# Altium PCB Interface_2 PCB.PcbDoc
Units mil, origin at the board's own origin, x right, y up, seen from the top; angles counter-clockwise.
Board outline 2362.2 x 1574.8 mil, 2 copper layers (Top Layer, Bottom Layer); 30 components, 31 nets, 120 pads, 31 vias.
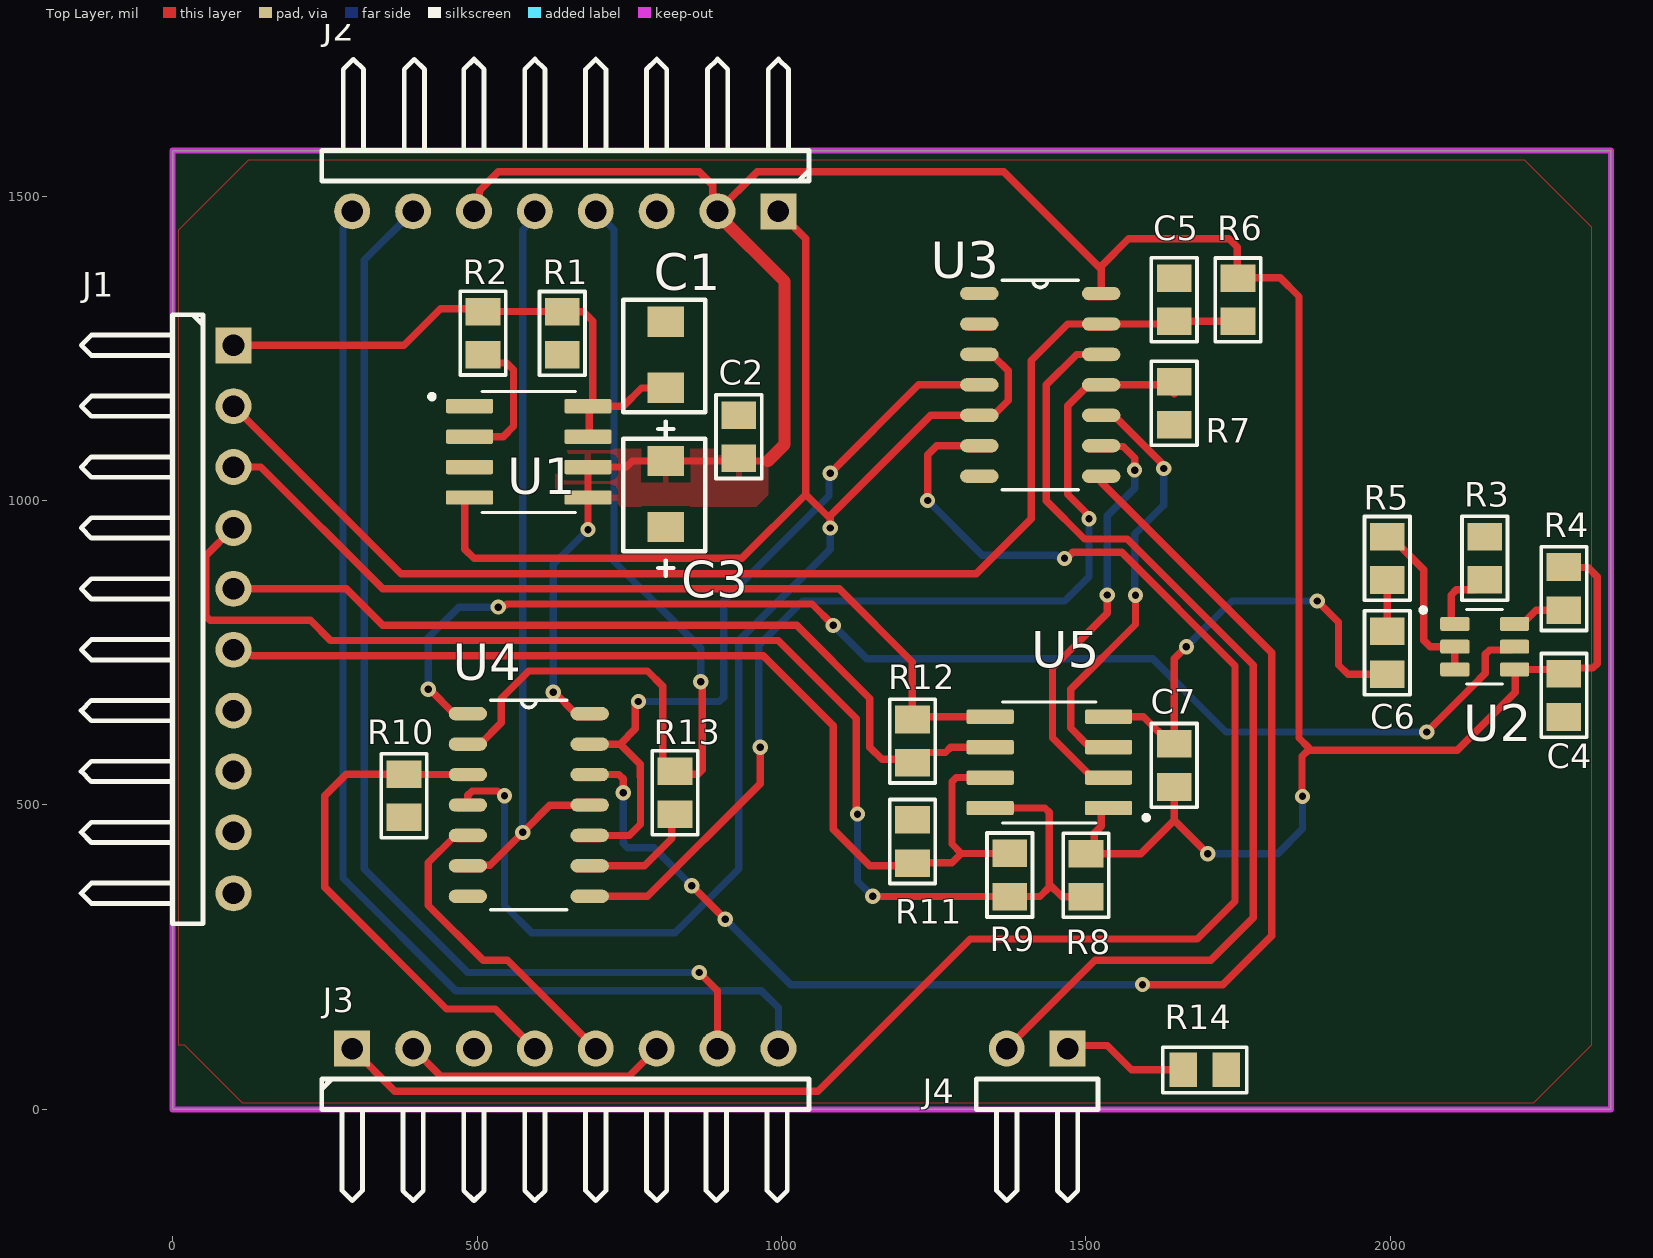
[diagram p0: Top Layer view]
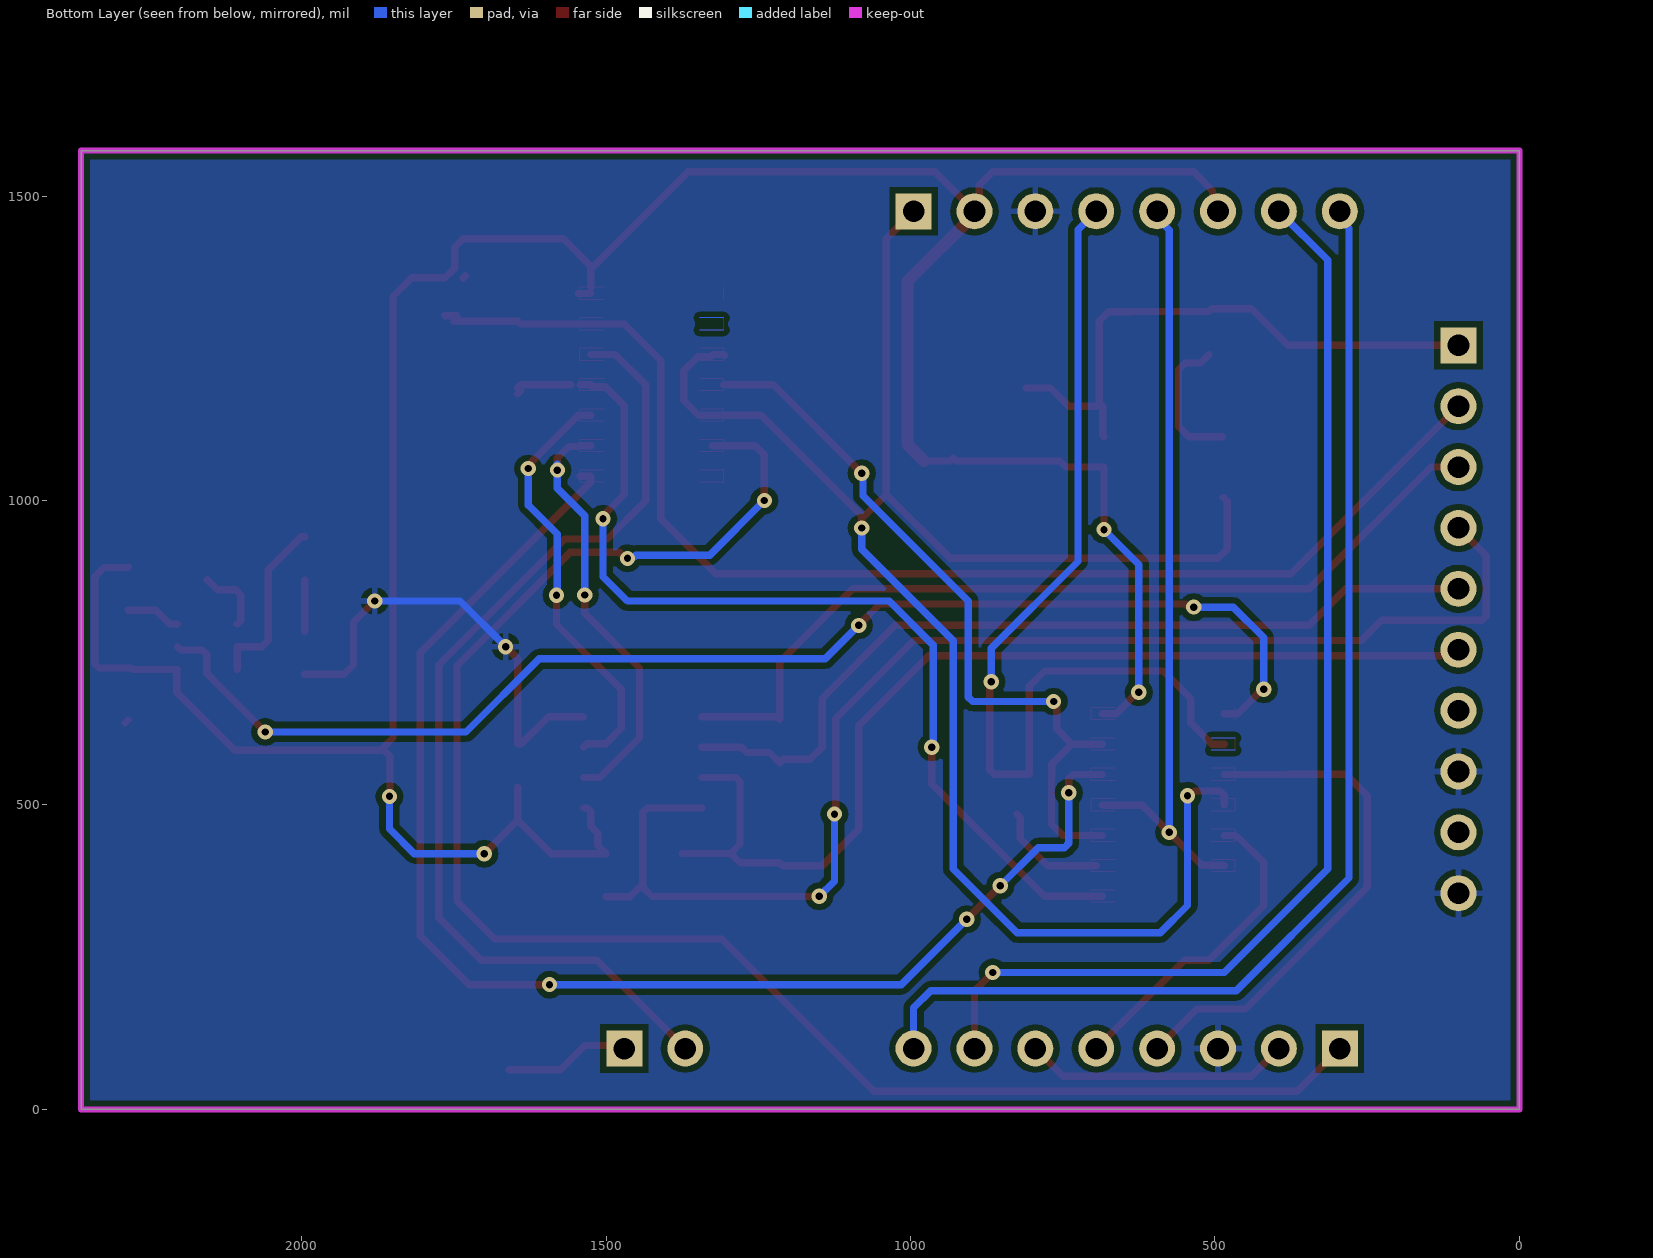
[diagram p1: Bottom Layer view, seen from below]
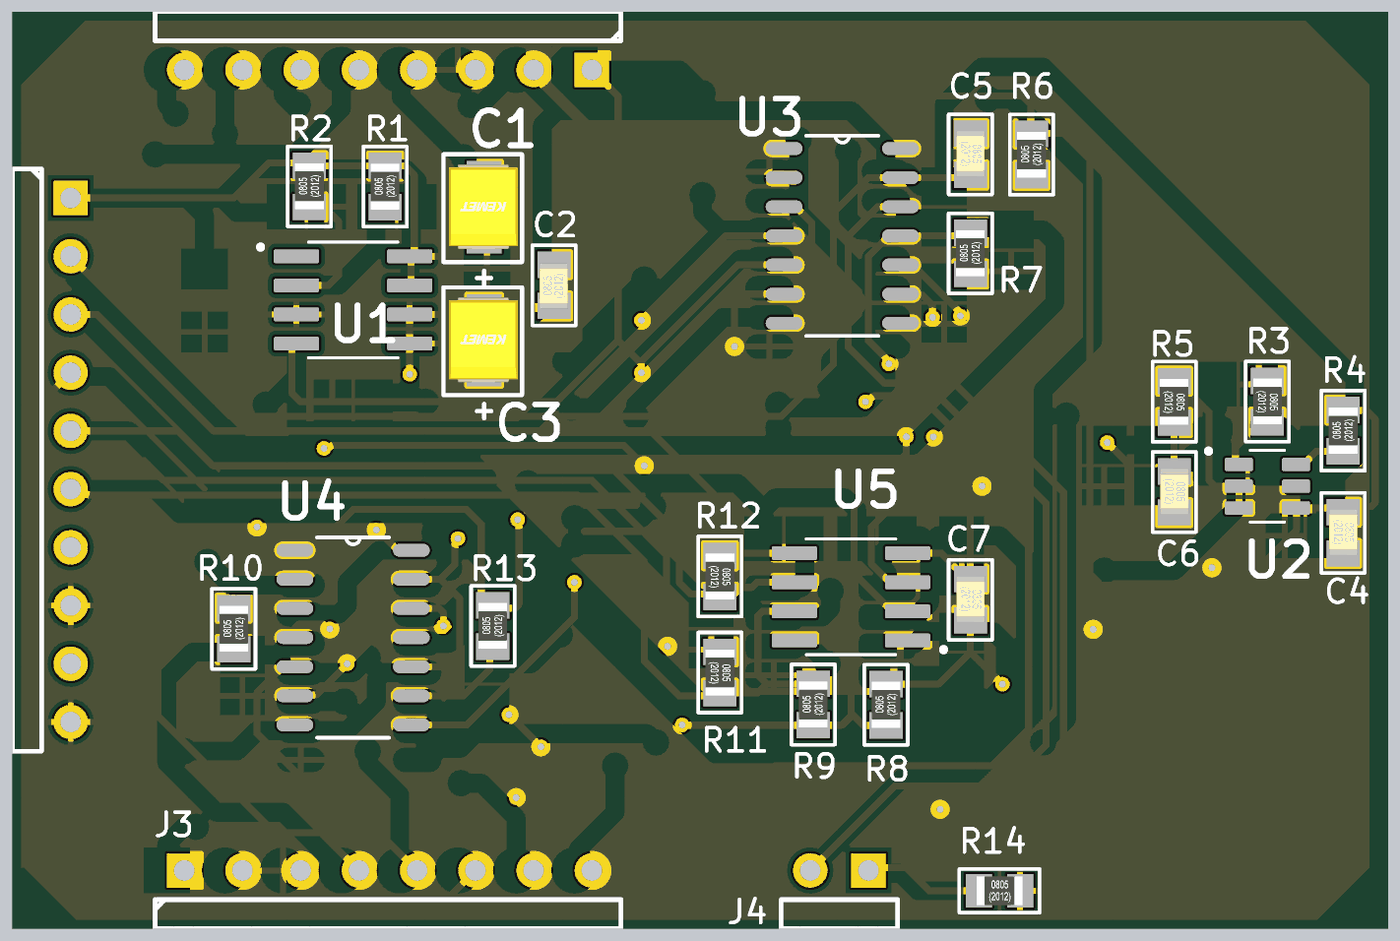
[diagram p2: 3D render of the assembled board from above, using the file's embedded part models]

## Layer stack, top to bottom
Top Solder: solder mask 0.4, Solder Resist, Dk 3.5
Top Layer: signal copper 1.4
Dielectric 1: dielectric 12.6, FR-4, Dk 4.8
Bottom Layer: signal copper 1.4
Bottom Solder: solder mask 0.4, Solder Resist, Dk 3.5

## Board outline
0,0 0,1574.8 2362.2,1574.8 2362.2,0

## Design rules (kind name [scope] priority, off if disabled: settings)
Clearance Clearance_1 [All] p1: gap=10 ignorepadtopadclearanceinfootprint=FALSE
Clearance Clearance_u3 [InPadClass('u3')] p2: gap=3.7 ignorepadtopadclearanceinfootprint=FALSE
PolygonConnect [All] p1: connectstyle=Relief reliefconductorwidth=10 reliefentries=4 polygonreliefangle="90 Angle" airgapwidth=10
RoutingVias [All] p1: holewidth=28 width=50 viastyle="Through Hole" minholewidth=12 minwidth=25 maxholewidth=28 maxwidth=50
SolderMaskExpansion [All] p1: expansion=4 istentingtop=FALSE
Width [All] p1: maxlimit=100 minlimit=12 preferedwidth=20 minimp=50.000000 maximp=50.000000 favimp=50.000000
30 further rules are at their usual default settings.

## Classes and differential pairs
pad class u3: U3-1 U3-2 U3-3 U3-4 U3-5 U3-6 U3-7 U3-8 U3-9 U3-10 U3-11 U3-12 U3-13 U3-14
component class "Interface_2 SCH": C1 C2 C3 C4 C5 C6 C7 J2 J3 J4 R1 R2 R3 R4 R5 R6 R7 R8 R9 R10 R11 R12 R13 R14 U2 U3 U4 U5

## Components (designator, comment, footprint, x,y, rotation, side; value= is the part's Value field where it differs from the comment)
C1 "10uF" CASE-B 810,1185 r90 top
C2 "100nF" CAPC2012X14N(0805) 930,1105 r90 top
C3 "10uF" CASE-B 810,956.57 r90 top
C4 "100nF" CAPC2012X14N(0805) 2285,680 r270 top
C5 "100nF" CAPC2012X14N(0805) 1645,1330 r270 top
C6 "100nF" CAPC2012X14N(0805) 1995,750 r270 top
C7 "100nF" CAPC2012X14N(0805) 1645,565 r270 top
J1 "2x10 Header" HEADER-2x10H 100,1255 r270 top
J2 "177537-8" HEADER-1X8H 995,1475 r180 top
J3 "177537-8" HEADER-1X8H 295,100 r0 top
J4 "1x2 Header" HEADER-1X2H 1470,100 r180 top
R1 "100K" RESC2013X70N(0805) 640,1274.57 r90 top
R2 "330K" RESC2013X70N(0805) 510,1275 r90 top
R3 "1K" RESC2013X70N(0805) 2155,905.43 r270 top
R4 "22K" RESC2013X70N(0805) 2285,855.43 r90 top
R5 "100K" RESC2013X70N(0805) 1995,905 r270 top
R6 "47K" RESC2013X70N(0805) 1750,1329.57 r90 top
R7 "100K" RESC2013X70N(0805) 1645,1160 r90 top
R8 "10K" RESC2013X70N(0805) 1500,384.57 r90 top
R9 "1K" RESC2013X70N(0805) 1375,385 r90 top
R10 "100K" RESC2013X70N(0805) 380,515 r90 top
R11 "10K" RESC2013X70N(0805) 1215,440 r270 top
R12 "1K" RESC2013X70N(0805) 1215,605 r270 top
R13 "0R" RESC2013X70N(0805) 825,520 r90 top
R14 "1M" RESC2013X70N(0805) 1695,65 r0 top
U1 "TPS76633D" SOIC-8 585,1080 r0 top
U2 "FDC6324L" SUPERSOT-6 2155,760 r0 top
U3 "74HC14" SO-14#1 1425,1190 r0 top
U4 "74HC126D" SO-14#2 585,500 r0 top
U5 "ADM3490ARZ" SOIC-8 1440,570 r180 top

## Footprints (in the part's own frame and the unit in brackets; to place one, negate y for a bottom-side part, rotate by r counter-clockwise, add the part's x,y. Pads: shape width x height; smd on the part's side, far side on the other; paste and mask are expansions set on the pad)
CAPC2012X14N(0805) [mm] "Chip Capacitor, 2-Leads, Body 2,00x1,25mm, IPC Medium Density"
  rect 1.15x1.45 smd: 1(-0.9,0) 2(0.9,0)
  silkscreen extent -1.75,-0.95 1.75,0.95, body extent -1.03,-0.62 0.97,0.64, height 1.38
CASE-B [mil]
  rect 50x60 smd mask+4: 1(0,0) 2(108.43,0)
  silkscreen extent -80,-65 145,70, body extent -18,-58 128,60, height 82
HEADER-1X2H [mm] "Connector; Header; 2 Position; Right Angle"
  rect 1.5x1.5 hole 0.9: 1(0,0)
  round 1.5 hole 0.9: 2(2.54,0)
  silkscreen extent -1.27,1.27 3.81,6.35
HEADER-1X8H [mm] "Connector; Header; 6 Position; Right Angle"
  rect 1.5x1.5 hole 0.9: 1(0,0)
  round 1.5 hole 0.9: 2(2.54,0) 3(5.08,0) 4(7.62,0) 5(10.16,0) 6(12.7,0) 7(15.24,0) 8(17.78,0)
  silkscreen extent -1.27,-6.35 19.05,-1.27
HEADER-2x10H [mm] "Connector; Header; 6 Position; Right Angle"
  rect 1.5x1.5 hole 0.9: 1(0,0)
  round 1.5 hole 0.9: 2(2.54,0) 3(5.08,0) 4(7.62,0) 5(10.16,0) 6(12.7,0) 7(15.24,0) 8(17.78,0) 9(20.32,0) 10(22.86,0)
  silkscreen extent -1.27,-6.36 24.13,-1.27
RESC2013X70N(0805) [mm] "Chip Resistor, 2-Leads, Body 2,00x1,25mm, IPC Medium Density"
  rect 1.15x1.45 smd: 1(-0.9,0) 2(0.9,0)
  silkscreen extent -1.75,-0.95 1.75,0.95, body extent -1,-0.62 1,0.63, height 0.48
SO-14#1 [mil]
  oval 63x22 smd: 1(-100,150) 2(-100,100) 3(-100,50) 4(-100,0) 5(-100,-50) 6(-100,-100) 7(-100,-150) 8(100,-150) 9(100,-100) 10(100,-50) 11(100,0) 12(100,50) 13(100,100) 14(100,150)
  Top Layer lines w0: -118,90 -118,110 ; -118,140 -118,150 -118,160 ; -79,-160 -100,-160 -118,-160 -118,-150 -118,-140 -100,-140 -79,-140 ; -79,-110 -100,-110 -118,-110 -118,-100 -118,-90 -100,-90 -79,-90 ; -79,-60 -100,-60 -118,-60 -118,-50 -118,-40 -100,-40 -79,-40 ; -79,-10 -100,-10 -118,-10 -118,0 -118,10 -100,10 -79,10 ; -79,40 -100,40 -118,40 -118,50 -118,60 -100,60 -79,60 ; 79,-160 100,-160 118,-160 118,-150 118,-140 100,-140 79,-140 ; 79,-110 100,-110 118,-110 118,-100 118,-90 100,-90 79,-90 ; 79,-60 100,-60 118,-60 118,-50 118,-40 100,-40 79,-40 ; 79,-10 100,-10 118,-10 118,0 118,10 100,10 79,10 ; 79,40 100,40 118,40 118,50 118,60 100,60 79,60 ; 79,90 100,90 118,90 118,99.79 118,100 118,110 100,110 79,110 ; 79,140 100,140 118,140 118,150 118,160 100,160 79,160
  Multi-Layer lines w0: -118,90 -79,90 ; -118,110 -79,110
  silkscreen extent -62,-172 62,172
SO-14#2 [mil]
  oval 63x22 smd: 1(-100,150) 2(-100,100) 3(-100,50) 4(-100,0) 5(-100,-50) 6(-100,-100) 7(-100,-150) 8(100,-150) 9(100,-100) 10(100,-50) 11(100,0) 12(100,50) 13(100,100) 14(100,150)
  Top Layer lines w0: -118,90 -118,100 -118,110 ; -118,140 -118,150 -118,160 ; -79,-110 -100,-110 -118,-110 -118,-100 -118,-90 -100,-90 -79,-90 ; -79,-60 -100,-60 -118,-60 -118,-50 -118,-40 -100,-40 -79,-40 ; -79,-10 -100,-10 -118,-10 -118,0 -118,10 -100,10 -79,10 ; -79,40 -100,40 -118,40 -118,50 -118,60 -100,60 -79,60 ; 79,-160 100,-160 118,-160 118,-150 118,-140 110,-140 100,-140 79,-140 ; 79,-110 100,-110 118,-110 118,-100 118,-90 100,-90 79,-90 ; 79,-60 100,-60 118,-60 118,-50 118,-40 100,-40 79,-40 ; 79,-10 100,-10 118,-10 118,0 118,10 100,10 79,10 ; 79,40 100,40 118,40 118,50 118,60 100,60 79,60 ; 79,90 100,90 118,90 118,100 118,110 100,110 79,110 ; 79,140 100,140 118,140 118,150 118,160 100,160 79,160
  Multi-Layer lines w0: -118,90 -100,90 -79,90 ; -118,110 -100,110 -79,110
  silkscreen extent -62,-172 62,172
SOIC-8 [mm]
  rrect25% 1.97x0.6 smd: 1(-2.47,1.905) 2(-2.47,0.635) 3(-2.47,-0.635) 4(-2.47,-1.905) 5(2.47,-1.905) 6(2.47,-0.635) 7(2.47,0.635) 8(2.47,1.905)
  silkscreen extent -4.14,-2.52 1.95,2.52
SUPERSOT-6 [mm]
  rrect25% 1.22x0.58 smd: 1(-1.245,0.95) 2(-1.245,0) 3(-1.245,-0.95) 4(1.245,-0.95) 5(1.245,0) 6(1.245,0.95)
  silkscreen extent -2.66,-1.56 0.75,1.63

## Part data
C1 C3: library part 293D106X0004A2TE3, "Cap Tant Solid 10uF 4V A CASE 20% (3.2 X 1.6 X 1.6mm) SMD 3216-18 5.1 Ohm 125C T/R", Case/Package=Molded, Dielectric Material=Tantalum, ESR (Equivalent Series Resistance)=5.1R, Manufacturer="Vishay Sprague", Max Operating Temperature=125°C, Min Operating Temperature=-55°C, Package Quantity=2000, Tolerance=20%, Voltage Rating=4V, Voltage Rating (DC)=0uV, Capacitance=10uF, Category="Tantalum Capacitors", Component=22, Dissipation Factor=6%, Manufacturer Part Number=293D106X0004A2TE3, Mount="Surface Mount", Packaging="Tape and Reel", Polarity=Polar, Pricing 1="2000=0,14061, 4000=0,13717, 8000=0,13524, 12000=0,13138, 16000=0,12848 (USD)", RoHS=Yes, Supplier 1=Avnet, Supplier Part Number 1=293D106X0004A2TE3
C2 C4 C5 C6 C7: library part 0805YC104K4Z2A, "Cap Ceramic 0.1uF 16V X7R 10% SMD 0805 FlexiTerm 125°C Paper T/R", Case Code (Metric)=2012, Case Code (Imperial)=0805, Dielectric=X7R, Manufacturer=AVX, Max Operating Temperature=125°C, Min Operating Temperature=-55°C, Package Quantity=4000, Ratings=AEC-Q200, Supplier Part Number 1=581-0805YC104K4Z2A, Tolerance=10%, Voltage Rating=16V, Capacitance=100nF, Case/Package=0805, Category="Ceramic Capacitors", Component=23, ComponentLink1Description=https://datasheet.ciiva.com/11504/flexiterm-11504202.pdf?src-supplier=Avnet, ComponentLink1URL=https://datasheet.ciiva.com/11504/flexiterm-11504202.pdf?src-supplier=Avnet, ComponentLink2Description=https://datasheet.ciiva.com/207/flexiterm-207787.pdf?src-supplier=Digi-Key, ComponentLink2URL=https://datasheet.ciiva.com/207/flexiterm-207787.pdf?src-supplier=Digi-Key, ComponentLink3Description=http://datasheet.octopart.com/0805YC104K4Z2A-AVX-Interconnect---Elco-datasheet-5313949.pdf?src-supplier=Newark, ComponentLink3URL=http://datasheet.octopart.com/0805YC104K4Z2A-AVX-Interconnect---Elco-datasheet-5313949.pdf?src-supplier=Newark, ComponentLink4Description=http://datasheet.octopart.com/0805YC104K4Z2A-AVX-Interconnect---Elco-datasheet-8451785.pdf?src-supplier=Newark, ComponentLink4URL=http://datasheet.octopart.com/0805YC104K4Z2A-AVX-Interconnect---Elco-datasheet-8451785.pdf?src-supplier=Newark, ComponentLink5Description=http://datasheet.octopart.com/0805YC104K4Z2A-AVX-datasheet-13516023.pdf, ComponentLink5URL=http://datasheet.octopart.com/0805YC104K4Z2A-AVX-datasheet-13516023.pdf, Depth=1.25mm, Features="Soft Termination", Height=0.94mm, Length=2.01mm, Manufacturer Part Number=0805YC104K4Z2A, Mount="Surface Mount", Number of Pins=2, Packaging="Tape and Reel", Pricing 1="1=0,32000, 10=0,22100, 100=0,13300, 500=0,10000, 1000=0,08400, 2000=0,07100 (USD)", Radiation Hardening=No, Stock 1=2532, Supplier 1=Mouser, Termination=SMD/SMT, Thickness=0.037inch, Voltage Rating (DC)=16V, Width=0.049inch
J1: library part "1-828430-0 (2)", "Headers & Wire Housings 2X10P AMPMODU II STIFTLEI", Manufacturer="TE Connectivity AMP", Package=None, Supplier Part Number 1=97X0190, Availability=Bad, Category="Headers and Wire Housings", Component=12, Contact Material=CuZn, Contact Plating=Gold,Tin, EU_RoHS_Compliance=Compliant, Housing Material=PBT, Manufacturer Part Number="1-828430-0 (2)", MF="TE Connectivity", Mount="Through Hole", MP=1-1241164-0, Price=None, Pricing 1="4800=1,41000 (USD)", RoHS=Yes, SnapEDA_Link=https://www.snapeda.com/parts/1-1241164-0/TE%20Connectivity/view-part/2365578/?ref=snap, Supplier 1=Newark
J2 J3: library part 90120-0928, "Molex C-GRID III Series, Series Number 90120, 2.54mm Pitch 8 Way 1 Row Straight PCB Header, Solder Termination, 3A", Current Rating=3A, Manufacturer=Molex, Max Operating Temperature=125°C, Min Operating Temperature=-55°C, Supplier Part Number 1=70373980, Voltage Rating=350V, Category="Headers and Wire Housings", Check_prices=https://www.snapeda.com/parts/177537-8/TE%20Connectivity%20AMP%20Connectors/view-part/1407135/?ref=eda, Component=11, Contact Material=Brass, Contact Plating=Gold, Housing Material=Polyester, Manufacturer Part Number=90120-0928, Pricing 1="5=0,75000, 25=0,72000, 50=0,70000, 250=0,67000, 500=0,63000 (USD)", RoHS=Yes, SnapEDA_Link=https://www.snapeda.com/parts/177537-8/TE%20Connectivity%20AMP%20Connectors/view-part/1407135/?ref=snap, Supplier 1="Allied Electronics", Termination="Through Hole"
J4: library part OSTOQ025450, "TERM BLOCK HDR 2POS VERT 5.08MM", Color=Green, Manufacturer="On-Shore Technology", Max Operating Temperature=105°C, Min Operating Temperature=-30°C, Supplier Part Number 1=ED2843-ND, Category="Terminal Blocks", Component=7, Contact Plating=Tin, Manufacturer Part Number=OSTOQ025450, Mount="Through Hole", Number of Pins=2, Number of Positions=2, Packaging=Bulk, Pricing 1="1=0,51000, 10=0,28000, 25=0,20880, 50=0,18620, 100=0,18250, 250=0,16060, 500=0,14600, 1000=0,13140, 5000=0,09855 (USD)", RoHS=Yes, Stock 1=6008, Supplier 1=Digi-Key, Termination=Solder
R1 R5 R7 R10: library part RT0805BRB07100KL, "Res Thin Film 0805 100K Ohm 0.1% 0.125W(1/8W) ±10ppm/C Molded SMD Paper T/R", Case Code (Metric)=2012, Case Code (Imperial)=0805, Manufacturer=Yageo, Max Operating Temperature=125°C, Max Power Dissipation=125mW, Min Operating Temperature=-55°C, Package Quantity=5000, Resistance=100kR, Resistor Type="Thin Film", Supplier Part Number 1=603-RT0805BRB07100KL, Temperature Coefficient=10ppm/°C, Tolerance=0.1%, Voltage Rating=150V, Case/Package=0805, Category="Chip SMD Resistors", Component=27, ComponentLink1Description=https://datasheet.ciiva.com/12720/pyu-rt-1-to-0-05-rohs-l-4-12720806.pdf?src-supplier=Mouser, ComponentLink1URL=https://datasheet.ciiva.com/12720/pyu-rt-1-to-0-05-rohs-l-4-12720806.pdf?src-supplier=Mouser, ComponentLink2Description=https://datasheet.ciiva.com/8887/pyu-rt-1-to-0-05-rohs-l-4-8887896.pdf?src-supplier=Avnet, ComponentLink2URL=https://datasheet.ciiva.com/8887/pyu-rt-1-to-0-05-rohs-l-4-8887896.pdf?src-supplier=Avnet, Contact Plating=Tin,Matte, Depth=1.25mm, Features="Moisture Resistant", Height=0.024inch, Length=0.079inch, Manufacturer Part Number=RT0805BRB07100KL, Military Standard=Not, Number of Terminations=2, Packaging="Tape and Reel", Power Rating=125mW, Pricing 1="1=0,95000, 10=0,68200, 100=0,38700, 1000=0,31300, 5000=0,26900, 10000=0,26000 (USD)", Radiation Hardening=No, RoHS=Yes, Stock 1=5448, Supplier 1=Mouser, Termination=SMD/SMT, Width=0.049inch
R2: library part RC2012J334CS, "Res Thick Film 0805 330K Ohm 5% 0.125W(1/8W) ±100ppm/C Molded SMD T/R", Case Code (Metric)=2012, Case Code (Imperial)=0805, Manufacturer=Samsung, Max Operating Temperature=155°C, Max Power Dissipation=125mW, Min Operating Temperature=-55°C, Resistance=330kR, Resistor Type="Thick Film", Supplier Part Number 1=1276-5588-1-ND, Temperature Coefficient=100ppm/°C, Tolerance=5%, Voltage Rating (DC)=150V, Case/Package=0805, Category="Chip SMD Resistors", Component=19, ComponentLink1Description=https://datasheet.ciiva.com/15196/getdatasheetpartid-714836-15196272.pdf?src-supplier=Verical, ComponentLink1URL=https://datasheet.ciiva.com/15196/getdatasheetpartid-714836-15196272.pdf?src-supplier=Verical, ComponentLink2Description=https://datasheet.ciiva.com/26156/chip-resistor-150112-1-26156574.pdf?src-supplier=Digi-Key, ComponentLink2URL=https://datasheet.ciiva.com/26156/chip-resistor-150112-1-26156574.pdf?src-supplier=Digi-Key, ComponentLink3Description=https://datasheet.ciiva.com/26156/chip-resistor-150112-1-26156588.pdf?src-supplier=Digi-Key, ComponentLink3URL=https://datasheet.ciiva.com/26156/chip-resistor-150112-1-26156588.pdf?src-supplier=Digi-Key, ComponentLink4Description=https://datasheet.ciiva.com/26156/chip-resistor-150112-1-26156606.pdf?src-supplier=Digi-Key, ComponentLink4URL=https://datasheet.ciiva.com/26156/chip-resistor-150112-1-26156606.pdf?src-supplier=Digi-Key, Contact Plating=Tin, Depth=1.25mm, Features="Moisture Resistant", Height=0.024inch, Lead Free="Lead Free", Length=0.079inch, Manufacturer Part Number=RC2012J334CS, Military Standard=Not, Number of Terminations=2, Packaging="Tape and Reel", Power Rating=125mW, Pricing 1="1=0,14000, 10=0,12600 (USD)", Radiation Hardening=No, RoHS=Yes, Stock 1=24, Supplier 1=Digi-Key, Width=0.049inch
R3 R9 R12: library part CRCW08051K00FKEA, "Res Thick Film 0805 1K Ohm 1% 0.125W(1/8W) ±100ppm/C Pad SMD Automotive T/R", Case Code (Metric)=2012, Case Code (Imperial)=0805, Manufacturer="Vishay Dale", Max Operating Temperature=155°C, Min Operating Temperature=-55°C, Package Quantity=5000, Power Rating=125mW, Resistance=1kR, Supplier Part Number 1=541-1.00KCCT-ND, Temperature Coefficient=100ppm/°C, Tolerance=1%, Voltage Rating=150V, Case/Package=0805, Category="Chip SMD Resistors", Component=15, ComponentLink1Description=https://datasheet.ciiva.com/11808/0900766b80d98b26-11808530.pdf?src-supplier=RSComponents, ComponentLink1URL=https://datasheet.ciiva.com/11808/0900766b80d98b26-11808530.pdf?src-supplier=RSComponents, ComponentLink2Description=https://datasheet.ciiva.com/46381/1697337-46381606.pdf?src-supplier=Element14, ComponentLink2URL=https://datasheet.ciiva.com/46381/1697337-46381606.pdf?src-supplier=Element14, ComponentLink3Description=https://datasheet.ciiva.com/3258/dcrcwe3-3258215.pdf?src-supplier=Avnet, ComponentLink3URL=https://datasheet.ciiva.com/3258/dcrcwe3-3258215.pdf?src-supplier=Avnet, ComponentLink4Description=https://datasheet.ciiva.com/26312/fld-crcw-e3-data-en-26312922.pdf?src-supplier=Distrelec, ComponentLink4URL=https://datasheet.ciiva.com/26312/fld-crcw-e3-data-en-26312922.pdf?src-supplier=Distrelec, ComponentLink5Description=https://datasheet.ciiva.com/46441/1720486-46441626.pdf?src-supplier=Element14, ComponentLink5URL=https://datasheet.ciiva.com/46441/1720486-46441626.pdf?src-supplier=Element14, ComponentLink6Description=https://datasheet.ciiva.com/16213/dcrcwe3-16213643.pdf?src-supplier=Future+Electronics, ComponentLink6URL=https://datasheet.ciiva.com/16213/dcrcwe3-16213643.pdf?src-supplier=Future+Electronics, ComponentLink7Description=https://datasheet.ciiva.com/17204/dcrcwe3-17204396.pdf?src-supplier=Avnet+Europe, ComponentLink7URL=https://datasheet.ciiva.com/17204/dcrcwe3-17204396.pdf?src-supplier=Avnet+Europe, Composition="Thick Film", Contact Plating=Tin, Depth=1.25mm, Height=0.45mm, Lead Free="Lead Free", Length=2mm, Manufacturer Part Number=CRCW08051K00FKEA, Military Standard=Not, Number of Pins=2, Packaging="Tape and Reel", Pricing 1="1=0,10000, 10=0,06000, 100=0,02450, 1000=0,01102, 2500=0,00957 (USD)", Radiation Hardening=No, REACH SVHC=Unknown, RoHS=Yes, Stock 1=304825, Supplier 1=Digi-Key, Termination=SMD/SMT, Voltage Rating (DC)=150V, Weight=0.000194oz, Width=1.25mm
R4: library part RC2012J223CS, "Res Thick Film 0805 22K Ohm 5% 0.125W(1/8W) ±100ppm/C Molded SMD T/R", Case Code (Metric)=2012, Case Code (Imperial)=0805, Manufacturer=Samsung, Max Operating Temperature=155°C, Max Power Dissipation=125mW, Min Operating Temperature=-55°C, Package Quantity=1, Resistance=22kR, Resistor Type="Thick Film", Temperature Coefficient=100ppm/°C, Tolerance=5%, Voltage Rating (DC)=150V, Case/Package=0805, Category="Chip SMD Resistors", Component=21, ComponentLink1Description=https://datasheet.ciiva.com/15196/getdatasheetpartid-714833-15196270.pdf?src-supplier=Verical, ComponentLink1URL=https://datasheet.ciiva.com/15196/getdatasheetpartid-714833-15196270.pdf?src-supplier=Verical, Contact Plating=Tin, Depth=1.25mm, Features="Moisture Resistant", Height=0.024inch, Lead Free="Lead Free", Length=2mm, Manufacturer Part Number=RC2012J223CS, Military Standard=Not, Number of Terminations=2, Packaging="Tape and Reel", Pricing 1="1=0,03520, 10=0,02340, 25=0,02230, 50=0,01260, 100=0,01070, 250=0,00950, 500=0,00740, 1000=0,00630, 3000=0,00540, 6000=0,00470, 15000=0,00430 (USD)", Radiation Hardening=No, RoHS=Yes, Stock 1=50703, Supplier 1="Arrow Electronics", Supplier Part Number 1=RC2012J223CS, Width=0.049inch
R6: library part RC0805FR-0747KL, "Res Thick Film 0805 47K Ohm 1% 1/8W 100ppm/C Molded SMD Paper T/R", Case Code (Metric)=2012, Case Code (Imperial)=0805, Manufacturer=Yageo, Max Operating Temperature=155°C, Min Operating Temperature=-55°C, Power Rating=125mW, Resistance=47kR, Resistor Type="Thick Film", Supplier Part Number 1=311-47.0KCRCT-ND, Temperature Coefficient=100ppm/°C, Tolerance=1%, Voltage Rating=150V, Case/Package=0805, Category="Chip SMD Resistors", Component=24, ComponentLink1Description=https://datasheet.ciiva.com/7941/1686128-7941799.pdf?src-supplier=Element14, ComponentLink1URL=https://datasheet.ciiva.com/7941/1686128-7941799.pdf?src-supplier=Element14, ComponentLink2Description=https://datasheet.ciiva.com/7941/444164-7941800.pdf?src-supplier=Element14, ComponentLink2URL=https://datasheet.ciiva.com/7941/444164-7941800.pdf?src-supplier=Element14, ComponentLink3Description=https://datasheet.ciiva.com/7941/444164-7941801.pdf?src-supplier=Element14, ComponentLink3URL=https://datasheet.ciiva.com/7941/444164-7941801.pdf?src-supplier=Element14, ComponentLink4Description=https://datasheet.ciiva.com/16742/rc0805-16742265.pdf?src-supplier=Future+Electronics, ComponentLink4URL=https://datasheet.ciiva.com/16742/rc0805-16742265.pdf?src-supplier=Future+Electronics, ComponentLink5Description=https://datasheet.ciiva.com/46447/444164-46447581.pdf?src-supplier=Element14, ComponentLink5URL=https://datasheet.ciiva.com/46447/444164-46447581.pdf?src-supplier=Element14, Contact Plating=Tin,Matte, Depth=1.25mm, Height=0.5mm, Lead Free="Lead Free", Length=2mm, Manufacturer Part Number=RC0805FR-0747KL, Number of Pins=2, Packaging="Tape and Reel", Pricing 1="1=0,10000, 10=0,03900, 100=0,01570, 1000=0,00705, 2500=0,00612 (USD)", Radiation Hardening=No, REACH SVHC=Unknown, RoHS=Yes, Stock 1=1306383, Supplier 1=Digi-Key, Termination=SMD/SMT, Voltage Rating (DC)=150V, Width=1.25mm
R8 R11: library part CRCW080510K0FKEAHP, "Res Thick Film 0805 10K Ohm 1% 0.33W(1/3W) ±100ppm/C Molded SMD Automotive Paper T/R", Case Code (Metric)=2012, Case Code (Imperial)=0805, Manufacturer=Vishay, Max Operating Temperature=155°C, Max Power Dissipation=333mW, Min Operating Temperature=-55°C, Package Quantity=10, Power Rating=330mW, Resistance=10kR, Resistor Type="Thick Film", Supplier Part Number 1=541-10.0KTCT-ND, Temperature Coefficient=100ppm/°C, Tolerance=1%, Voltage Rating=150V, Case/Package=0805, Category="Chip SMD Resistors", Component=22, ComponentLink1Description=https://datasheet.ciiva.com/8337/crcwhpe3-8337510.pdf?src-supplier=Avnet, ComponentLink1URL=https://datasheet.ciiva.com/8337/crcwhpe3-8337510.pdf?src-supplier=Avnet, ComponentLink2Description=https://datasheet.ciiva.com/2475/crcwhpe3-2475623.pdf?src-supplier=Digi-Key, ComponentLink2URL=https://datasheet.ciiva.com/2475/crcwhpe3-2475623.pdf?src-supplier=Digi-Key, ComponentLink3Description=https://datasheet.ciiva.com/2475/crcwhpe3-2475624.pdf?src-supplier=Digi-Key, ComponentLink3URL=https://datasheet.ciiva.com/2475/crcwhpe3-2475624.pdf?src-supplier=Digi-Key, ComponentLink4Description=https://datasheet.ciiva.com/2475/crcwhpe3-2475625.pdf?src-supplier=Digi-Key, ComponentLink4URL=https://datasheet.ciiva.com/2475/crcwhpe3-2475625.pdf?src-supplier=Digi-Key, ComponentLink5Description=https://datasheet.ciiva.com/5552/crcwhpe3-46056-5552265.pdf?src-supplier=Mouser, ComponentLink5URL=https://datasheet.ciiva.com/5552/crcwhpe3-46056-5552265.pdf?src-supplier=Mouser, ComponentLink6Description=https://datasheet.ciiva.com/46392/1885357-46392604.pdf?src-supplier=Element14, ComponentLink6URL=https://datasheet.ciiva.com/46392/1885357-46392604.pdf?src-supplier=Element14, Contact Plating=Tin, Depth=1.25mm, Features="Automotive AEC-Q200", Height=0.024inch, Lead Free="Lead Free", Length=2mm, Manufacturer Part Number=CRCW080510K0FKEAHP, Military Standard=Not, Mount="Surface Mount", Number of Terminations=2, Packaging="Tape and Reel", Pricing 1="1=0,24000, 10=0,20400, 100=0,07980, 1000=0,03339, 2500=0,03061 (USD)", Radiation Hardening=No, REACH SVHC="No SVHC", RoHS=Yes, Stock 1=22879, Supplier 1=Digi-Key, Termination=SMD/SMT, Voltage Rating (DC)=150V, Weight=0.000194oz, Width=0.049inch
R13: library part CRCW08050000Z0EB, "Res Thick Film 0805100K SMD Automotive T/R", Case Code (Metric)=2012, Case Code (Imperial)=0805, Manufacturer="Vishay Dale", Max Operating Temperature=155°C, Max Power Dissipation=125mW, Min Operating Temperature=-55°C, Package Quantity=10000, Resistance=0mR, Resistor Type="Thick Film", Supplier Part Number 1=541-CRCW08050000Z0EBCT-ND, Voltage Rating=150V, Case/Package=0805, Category="Chip SMD Resistors", Component=28, ComponentLink1Description=https://datasheet.ciiva.com/9109/dcrcwe3-9109990.pdf?src-supplier=Avnet, ComponentLink1URL=https://datasheet.ciiva.com/9109/dcrcwe3-9109990.pdf?src-supplier=Avnet, ComponentLink2Description=https://datasheet.ciiva.com/5549/dcrcwe3-109170-5549863.pdf?src-supplier=Mouser, ComponentLink2URL=https://datasheet.ciiva.com/5549/dcrcwe3-109170-5549863.pdf?src-supplier=Mouser, ComponentLink3Description=https://datasheet.ciiva.com/9109/dcrcwe3-9109967.pdf?src-supplier=Avnet, ComponentLink3URL=https://datasheet.ciiva.com/9109/dcrcwe3-9109967.pdf?src-supplier=Avnet, Contact Plating=Tin, Depth=1.25mm, Features="Automotive AEC-Q200", Height=0.02inch, Lead Free="Lead Free", Length=2mm, Manufacturer Part Number=CRCW08050000Z0EB, Military Standard=Not, Number of Terminations=2, Packaging="Tape and Reel", Power Rating=125mW, Pricing 1="1=0,10000, 10=0,03800, 25=0,02800, 50=0,02120, 100=0,01560, 250=0,01192, 500=0,00954, 1000=0,00702, 5000=0,00504 (USD)", Radiation Hardening=No, REACH SVHC=Unknown, RoHS=Yes, Stock 1=60801, Supplier 1=Digi-Key, Termination=SMD/SMT, Voltage Rating (DC)=150V, Weight=0.000194oz, Width=0.049inch
R14: library part ERJ-P06J105V, "Res Thick Film 0805 1M Ohm 5% 1/4W 200ppm/C Molded SMD SMD Punched Carrier T/R", Case Code (Metric)=2012, Case Code (Imperial)=0805, Manufacturer=Panasonic, Max Operating Temperature=155°C, Max Power Dissipation=500mW, Min Operating Temperature=-55°C, Package Quantity=1, Resistance=1MR, Resistor Type="Thick Film", Supplier Part Number 1=P1.0MADCT-ND, Temperature Coefficient=200ppm/°C, Tolerance=5%, Voltage Rating=400V, Voltage Rating (DC)=150V, Case/Package=0805, Category="Chip SMD Resistors", Component=23, ComponentLink1Description=https://datasheet.ciiva.com/11815/0900766b812cb812-11815881.pdf?src-supplier=RSComponents, ComponentLink1URL=https://datasheet.ciiva.com/11815/0900766b812cb812-11815881.pdf?src-supplier=RSComponents, ComponentLink2Description=https://datasheet.ciiva.com/16781/70068906-16781958.pdf?src-supplier=Allied+Electronics, ComponentLink2URL=https://datasheet.ciiva.com/16781/70068906-16781958.pdf?src-supplier=Allied+Electronics, ComponentLink3Description=https://datasheet.ciiva.com/16782/70068906-16782920.pdf?src-supplier=Allied+Electronics, ComponentLink3URL=https://datasheet.ciiva.com/16782/70068906-16782920.pdf?src-supplier=Allied+Electronics, ComponentLink4Description=https://datasheet.ciiva.com/16785/70068906-16785434.pdf?src-supplier=Allied+Electronics, ComponentLink4URL=https://datasheet.ciiva.com/16785/70068906-16785434.pdf?src-supplier=Allied+Electronics, ComponentLink5Description=https://datasheet.ciiva.com/7909/1913273-7909563.pdf?src-supplier=Element14, ComponentLink5URL=https://datasheet.ciiva.com/7909/1913273-7909563.pdf?src-supplier=Element14, ComponentLink6Description=https://datasheet.ciiva.com/24044/aoa0000ce4-64075-24044221.pdf?src-supplier=Mouser, ComponentLink6URL=https://datasheet.ciiva.com/24044/aoa0000ce4-64075-24044221.pdf?src-supplier=Mouser, ComponentLink7Description=https://datasheet.ciiva.com/17215/aoa0000ce4-17215262.pdf?src-supplier=Avnet+Europe, ComponentLink7URL=https://datasheet.ciiva.com/17215/aoa0000ce4-17215262.pdf?src-supplier=Avnet+Europe, Contact Plating=Tin, Depth=1.25mm, Features="Automotive AEC-Q200", Height=0.6mm, Lead Free="Lead Free", Length=2mm, Manufacturer Part Number=ERJ-P06J105V, Military Standard=Not, Mount="Surface Mount", Number of Terminations=2, Packaging="Tape and Reel", Power Rating=500mW, Pricing 1="1=0,11000, 10=0,09900, 100=0,03820, 1000=0,01679, 2500=0,01450 (USD)", Radiation Hardening=No, REACH SVHC=Unknown, RoHS=Yes, Stock 1=38353, Supplier 1=Digi-Key, Termination=SMD/SMT, Width=0.049inch
U1: library part TPS76633DG4, "IC REG LINEAR 3.3V 250MA 8SOIC", Case/Package=D, Manufacturer="Texas Instruments", Max Operating Temperature=125°C, Max Power Dissipation=904mW, Min Operating Temperature=-40°C, Supplier Part Number 1=595-TPS76633DG4, Category="Voltage Regulators - Linear", Check_prices=https://www.snapeda.com/parts/TPS76633D/Texas%20Instruments/view-part/480898/?ref=eda, Component=16, Manufacturer Part Number=TPS76633DG4, Number of Pins=8, Pricing 1="1=1,59000, 10=1,35000, 100=1,04000, 250=0,91300, 500=0,86400, 1000=0,67200, 2500=0,63900, 5000=0,61500, 10000=0,59600 (USD)", RoHS=Yes, SnapEDA_Link=https://www.snapeda.com/parts/TPS76633D/Texas%20Instruments/view-part/480898/?ref=snap, Stock 1=525, Supplier 1=Mouser
U2: "IC LOAD SWITCH INT 20VIN SSOT-6", Case/Package=SOT-23-6, Manufacturer="ON Semiconductor / Fairchild", Max Operating Temperature=150°C, Min Operating Temperature=-55°C, Supplier Part Number 1=FDC6324LCT-ND, Category="Hot Swap Controllers", Component=17, Manufacturer Part Number=FDC6324L, Mount="Surface Mount", Number of Pins=6, Pricing 1="1=0,60000, 10=0,52900, 25=0,49680, 100=0,37670, 250=0,32060, 500=0,30458, 1000=0,23244 (USD)", RoHS=Yes, Stock 1=56731, Supplier 1=Digi-Key, Weight=0.036g
U3: library part 74HC14D653, "IC, HEX INVERTER, SCHMITT TRIGGER SOIC14", Case/Package=SO, High Level Output Current=-5.2mA, Low Level Output Current=5.2mA, Manufacturer="NXP Semiconductors", Max Operating Temperature=125°C, Max Supply Voltage=6V, Min Operating Temperature=-40°C, Min Supply Voltage=2V, Operating Supply Voltage=5V, Output Current=25mA, Package="SOIC-14 ON Semiconductor", Package Quantity=2500, Quiescent Current=2uA, Supplier Part Number 1=74HC14D,653, Availability=Unavailable, Category="Logic Gates", Component=15, Contact Plating=Gold, DigiKey-Purchase-URL=https://snapeda.com/shop?store=DigiKey&id=2312735, Logic Function="Buffer,Inverter,Schmitt Trigger", Manufacturer Part Number=74HC14D653, MF="ON Semiconductor", Mount="Surface Mount", MP=74ACT14SCX, Number of Circuits=6, Number of Elements=6, Number of Pins=14, Number of Inputs=1, Packaging="Tape and Reel", Price=None, Propagation Delay=190ns, RoHS=Yes, SnapEDA_Link=https://www.snapeda.com/parts/74ACT14SCX/ON%20Semiconductor/view-part/2312735/?ref=snap, Supplier 1="Arrow Electronics", Turn-On Delay Time=21ns, Weight=0.009143oz
U4: library part 74HC126D-Q100J, "Buffer/Line Driver 4-CH Non-Inverting 3-ST CMOS 14-Pin SO T/R", Case/Package=SO, Manufacturer="NXP Semiconductors", Package="SOIC-14 NXP Semiconductors", Supplier Part Number 1=74AH2414, Availability=Unavailable, Category="Logic Gates", Component=18, Logic Function=Buffer, Manufacturer Part Number=74HC126D-Q100J, MF="Toshiba Semiconductor", MP=74HC126D, Number of Pins=14, Price=None, Pricing 1="5=0,36900, 10=0,30900, 25=0,26900, 50=0,22800, 100=0,18800, 250=0,17400, 500=0,16000, 1000=0,14600 (USD)", RoHS=Yes, SnapEDA_Link=https://www.snapeda.com/parts/74HC126D/Toshiba%20Semiconductor%20and%20Storage/view-part/32960/?ref=snap, Stock 1=2500, Supplier 1=Newark
U5: "Single Transmitter/Receiver RS-422/RS-485 8-Pin SOIC N Tube", Case/Package=SOIC, Manufacturer="Analog Devices", Max Operating Temperature=85°C, Min Operating Temperature=-40°C, Package="SOIC-8 Analog Devices", Supplier Part Number 1=ADM3490ARZ-ND, Availability=Unavailable, Category="RS-232 / RS-422 / RS-485 Interface ICs", Component=19, Contact Plating=Tin,Matte, Manufacturer Part Number=ADM3490ARZ, MF="Analog Devices", MP=ADM3490ARZ, Number of Pins=8, Price=None, Pricing 1="1=2,76000, 10=2,47500, 25=2,34000, 100=1,92400, 250=1,72640, 500=1,66400, 1000=1,50800 (USD)", RoHS=Yes, SnapEDA_Link=https://www.snapeda.com/parts/ADM3490ARZ/Analog%20Devices%20Inc./view-part/242544/?ref=snap, Stock 1=769, Supplier 1=Digi-Key, Weight=0.019048oz

## Via types
v1: diameter 25, hole 12, Top Layer to Bottom Layer, 31 vias

## Nets (pads, with @x,y where several pads share a name; then routed paths per layer and width w, separated by ;. In a path a pad name is that pad's centre, name@x,y a point inside that pad or via, vN(x,y) a via of type N, cw(c..) or ccw(c..) an arc to the next point about the centre after c; other vN are vias at no path point)
GND: C1.2 C2.2 C3.1 C4.2 C5.1 C6.2 C7.1 J1.8 J1.10 J2.3 J3.3 R1.1 R3.1 R7.1 R10.1 R11.1 R14.2 U1.3 U3.1 U3.7 U4.7 U5.4 | length 753.1
  Top Layer w12: U5.4 1594.53,645 1639.09,600.43 C7.1 1645,740 v1(1665,760) ; v1(1880,835) 1915,800 1915,730 1930.43,714.57 C6.2 ; C4.2@2285,639.57 C4.2@2290,634.57
  Bottom Layer w12: v1(1665,760) 1740,835 v1(1880,835)
NetC1_1: C1.1 J1.1 R1.2 R2.2 U1.7 U1.8 | length 954.6
  Top Layer w12: J1.1 380,1255 440,1315 505.43,1315 R2.2 639.57,1310.43 R1.2 675,1310 690,1295 690,1160.81 U1.8@684.19,1155 ; U1.7 684.19,1106.94 U1.8@684.19,1155 ; C1.1 770,1185 740,1155 690,1155 U1.8@684.19,1155
NetC6_1: C6.1 R5.2 | length 84.1
  Top Layer w12: C6.1 R5.2
NetJ2_1: J2.1 U1.4 U3.3 U3.5 U4.4 | length 3086.8
  Top Layer w12: U4.4 485,510 485,515.97 492.03,523 533.48,523 541.48,515 v1(545,515) ; U1.4 485.81,1005 480,999.19 480,920 495,905 935,905 1040,1010 ; J2.1 1040,1430 1040,1010 ; 1077.93,972.07 1040,1010 ; v1(1080,955) 1080,975 1245,1140 1307,1140 1348.21,1140 1372.5,1164.29 1372.5,1213 1348.77,1236.73 1328.27,1236.73 U3.3 1307,1240 U3.3@1305.09,1238.09
  Bottom Layer w12: v1(545,515) 545,335 590,290 825,290 930,395 930,770 1080,920 v1(1080,955)
NetJ2_7: J2.7 J3.7 | length 1867.1
  Top Layer w12: v1(865,225) 895,195 J3.7
  Bottom Layer w12: J2.7 315,1395 315,395 485,225 v1@861.14,225
NetJ2_8: J2.8 J3.8 | length 1978.4
  Top Layer w12: J3.8 J3.8@1000,105
  Bottom Layer w12: J2.8 295,1462.27 280,1447.27 280,380 465,195 966.78,195 995,166.78 J3.8
NetJ3_1: J3.1 U3.6 | length 2786.9
  Top Layer w12: J3.1 365,30 1060,30 1310,280 1682.95,280 1745,342.05 1745,728.89 1558.89,915 1478.52,915 1468.52,905 v1(1465,905) ; v1(1240,1000) 1240,1075 1255,1090 1307,1090 U3.6
  Bottom Layer w12: v1(1240,1000) 1330,910 1451.47,910 1453.98,907.49 1462.51,907.49 v1(1465,905)
NetJ3_5: J3.5 U4.5 | length 526.3
  Top Layer w12: U4.5 467,450 463.73,446.73 461.23,446.73 420,405.5 420,335 510,245 550,245 J3.5
NetJ4_1: J4.1 R14.1 | length 208.2
  Top Layer w12: J4.1 1475,105 1535,105 1575,65 R14.1
NetR2_1: R2.1 U1.2 | length 232.4
  Top Layer w12: U1.2 542.97,1105 560,1122.03 560,1215 549.03,1225.97 523.6,1225.97 R2.1
NetR3_2: R3.2 U2.1 | length 115.8
  Top Layer w12: U2.1 2105.42,797.4 2100,802.82 2100,845 2108.36,853.36 2138.36,853.36 R3.2
NetR4_1: R4.1 U2.6 | length 91.2
  Top Layer w12: U2.6@2204.63,796.78 U2.6 2216.61,797.4 2239.21,820 R4.1
NetR5_1: R5.1 U2.2 U2.3 | length 291
  Top Layer w12: R5.1 2000.91,940.43 2055,886.34 2055,770.53 2065.53,760 U2.2 U2.3
NetR13_1: R13.1 U4.9 | length 185.3
  Top Layer w12: U4.9@695,400 703,400 775,400 820,445 820,479.57 R13.1
NetU3_8: U3.8 U4.12 | length 2249.1
  Top Layer w12: U4.12 703,550 732.97,550 740,542.97 v1(740,520) ; v1(852.5,367.5) v1(907.5,312.5) ; U3.8@1543,1040 U3.8 1525,1030 1805,750 1805,285 1725,205 v1(1593.08,205)
  Bottom Layer w12: v1(740,520) 740,437.03 747.03,430 790,430 v1@853.91,366.09 ; v1(907.5,312.5) 1015,205 v1(1593.08,205)
NetU3_9: U3.9 U5.2 | length 708.2
  Top Layer w12: U3.9 1543,1090 1544.26,1088.74 1561.26,1088.74 1580,1070 v1(1580,1050) ; v1(1535,845) 1535,815 1445,725 1445,610.28 1510.28,545 U5.2
  Bottom Layer w12: v1(1535,845) 1535,975 1580,1020 v1(1580,1050) v1@1580,1060
NetU3_10: U3.10 U5.3 | length 702
  Top Layer w12: U3.10 1543,1140 1545.5,1140 1627.75,1057.75 v1(1627.75,1052.5) v1@1627.75,1047.25 ; U5.3 1531.43,600.81 1500.56,600.81 1475,626.37 1475,690 1581.34,796.34 1581.34,829.59
  Bottom Layer w12: v1@1580,840 1580,945 1627.5,992.5 ; 1627.75,992.5 v1(1627.75,1052.5)
  other v1: 1581.34,844.59
NewNet2: J3.2 J3.6 | length 437.7
  Top Layer w12: J3.2 440.53,54.47 749.47,54.47 J3.6
NewNet10: J1.4 R8.1 R9.1 U5.8 | length 2195.7
  Top Layer w12: J1.4 54.47,909.47 54.47,810.54 61.5,803.51 226.49,803.51 260,770 995,770 1123,642 1123,487 v1(1125,485) ; v1@1160,349.57 R9.1 1424.57,349.57 1440,365 1440,370 ; U5.8 1432.97,495 1440,487.97 1440,370 ; R8.1 1460.87,349.13 1440,370
  Bottom Layer w12: J1.4 J1.4@109,946 ; v1(1125,485) 1125,375 v1(1150,350)
NewNet11: J1.6 R9.2 R11.2 U5.7 | length 1726.8
  Top Layer w12: J1.6 109,746 129.56,746 130.56,745 970,745 1085,630 1085,460 1145,400 1210.43,400 R11.2 1215.43,405 1280,405 1295.43,420.43 ; U5.7 1287.03,545 1280,537.97 1280,435.87 1295.43,420.43 ; R9.2 1295.43,420.43
  Bottom Layer w12: J1.6 J1.6@105,750
NewNet12: J1.3 R12.1 U5.5 | length 1469.9
  Top Layer w12: J1.3 145,1055 345,855 1095,855 1215,735 1215,645 R12.1 1219.57,645 U5.5@1340.81,645
NewNet13: J1.5 R12.2 U5.6 | length 1418.4
  Top Layer w12: J1.5 285,855 345,795 1025,795 1145,675 1145,595 1165,575 1209.57,575 R12.2 1231.64,586.2 1269.36,586.2 1278.16,595 U5.6
NewNet17: J2.4 R13.2 U4.2 | length 1597.5
  Top Layer w12: U4.2 505,600 540,635 540,675 585,720 780,720 805,695 R13.2@805,555.43 ; R13.2@805,550.43 862.97,550.43 870,557.46 v1@870,700
  Bottom Layer w12: J2.4 725,1445 725,900 867.5,757.5 v1(867.5,702.5)
NewNet24: R7.2 U3.11 U4.8 | length 1646.7
  Top Layer w12: U4.8 703,350 780,350 965,535 v1(965,595) ; v1@1505,974.8 1470,1009.8 1470,1155.5 1501.23,1186.73 1521.73,1186.73 U3.11 U3.11@1543,1190 ; 1558,1190 1640.43,1190 R7.2@1645,1185.43 ; R7.2@1640,1180.43 R7.2@1645,1175.43
  Bottom Layer w12: v1@962.5,595 962.5,762.5 1035,835 1465,835 1505,875 v1(1505,970)
NewNet25: C5.2 J1.2 R6.1 U3.13 | length 2110.2
  Top Layer w12: J1.2 375,880 1320,880 1410,970 1410,1230 1470,1290 U3.13 1543,1290 1640.43,1290 C5.2 R6.1@1745,1294.57 ; R6.1@1745,1299.13 R6.1 ; R6.1@1745,1303.7 1760,1303.7 1764.57,1303.7 R6.1@1765,1304.13
NewNet28: J3.4 R10.2 U4.3 | length 854.6
  Top Layer w12: U4.3 467,550 380.43,550 R10.2 285.43,550.43 250,515 250,365 450,165 530,165 J3.4
NewNet33: U3.4 U4.10 U4.13 | length 1248.6
  Top Layer w12: U4.10 703,450 750,450 768.5,468.5 768.5,545.58 768.07,546.01 768.07,566.93 735,600 ; U4.13 703,600 735,600 ; v1@770,675 760,665 760,625 735,600 ; v1(1080,1045) 1225,1190 U3.4@1307,1190
  Bottom Layer w12: v1@762.87,670 897.97,670 905,677.03 905,835 1077.93,1007.93 1077.93,1042.93 v1(1080,1045)
  other v1: 765,670
NewNet34: U2.5 U4.1 | length 2136.7
  Top Layer w12: v1(420,690) 422.25,690 462.25,650 467,650 U4.1 ; v1(535,825) 537.49,827.49 546.02,827.49 548.53,830 1050,830 v1(1085,795) ; v1(2059.77,620) 2134.96,695.18 2156.05,716.28 2156.05,747.55 2163.08,754.58 2198.6,754.58 U2.5
  Bottom Layer w12: v1(420,690) 420,775 470,825 v1(535,825) ; v1(1085,795) 1140,740 1610,740 1730,620 v1(2059.77,620)
NewNet38: J2.5 U4.6 U4.11 | length 1269.7
  Top Layer w12: U4.6 486.26,401.26 521.26,401.26 577.07,457.07 619.43,499.43 684.43,499.43 U4.11
  Bottom Layer w12: v1(575,455) 575,1444.44 595,1464.44 J2.5
NewNet47: J4.2 U3.12 | length 1661.8
  Top Layer w12: J4.2 1515,245 1705,245 1775,315 1775,730 1568,937 1497.7,937 1435,999.7 1435,1190 1485,1240 U3.12
VCC: C2.1 C3.2 C4.1 C7.2 J2.2 J2.6 R4.2 R6.2 R8.2 U1.5 U1.6 U2.4 U3.14 U4.14 U5.1 | length 5139.6
  Top Layer w12: J2.6 504,1484 504,1509 535,1540 865,1540 887.27,1517.73 887.27,1482.73 J2.2 ; v1(625,685) 627.25,685 662.25,650 U4.14 ; v1(682.24,952.24) U1.5 U1.6 745,1055 755,1065 C3.2 925.43,1065 C2.1 934.57,1065 977.97,1065 ; J2.2@895,1470 J2.2 ; U3.14 1543,1340 U3.14@1545.5,1340 ; U3.14@1525,1350 1525,1380 ; U5.1 1530.81,495 1525,489.19 1525,465 1513.61,453.61 1513.61,433.61 R8.2 1590,420 1645,475 ; C7.2 1645,475 ; v1(1700,420) 1645,475 ; R6.2@1730.87,1369.13 R6.2@1735,1365 ; v1@1850,510 v1@1855,515 ; v1(1855.86,514.14) v1@1855,515 ; R4.2 2285.87,890 2325,890 2340,875 2340,732.03 2332.97,725 2280.24,725 2277.83,722.6 U2.4 2205,721.61 2205,685 2110,590 1865,590 ; J2.2 960,1540 1365,1540 1525,1380 ; 1525,1380 1525,1385 1570,1430 1735,1430 1748.7,1416.3 1748.7,1381.64 1764.47,1365.87 1819.13,1365.87 1850,1335 1850,610 1865,595 1865,590 ; v1@1855,515.01 1855,580 1865,590
  Top Layer w20: J2.2@895,1470 1005,1360 1005,1092.03 977.97,1065
  Bottom Layer w12: v1(625,685) 625,895 v1(682.24,952.24) ; v1@1696.67,420 1815,420 1855.86,460.86 v1(1855.86,514.14)
pads on no net: J1.7 J1.9 U1.1 U3.2

## Polygon pours and split planes (outlines as drawn)
VCC on Top Layer "NONET_L-01_P-001" (solid, remove dead copper, pour order 7): 640,989.6 628.44,1001.16 628.7,1067.1 646.59,1085 958.3,1085 978.7,1064.6 978.7,1009.6 958.7,989.6
no net on Top Layer "NONET_L-01_P-001" (solid, remove dead copper, pour order 6): 35,1550
GND on Top Layer "NONET_L-01_P-001" (solid, remove dead copper, shelved, pour order 0): 10,1445 125,1560 2220,1560 2330,1450 2330,105 2235,10 115,10 20,105 10,105
no net on Top Layer "NONET_L-01_P-001" (solid, remove dead copper, pour order 1): 20,1485
GND on Bottom Layer "NONET_L-01_P-001" (solid, remove dead copper, pour order 9): -215,1825 2530,1825 2540,1815 2535,1810 2535,-260 -180,-260 -205,-235 -205,1805 -210,1810 -210,1845

## Keep-outs
Keep-Out Layer:
  the board outline again, w10

## Silkscreen, mask and mechanical layers (free items; w line width, h text height)
Mechanical 1:
  the board outline again, w7